# Altium PCB HatpicPCB.pcbdoc
Units mil, origin at the board's own origin, x right, y up, seen from the top; angles counter-clockwise.
Board outline 3892.06 x 4870.86 mil, 2 copper layers (Top Layer, Bottom Layer); 102 components, 80 nets, 328 pads, 102 vias.
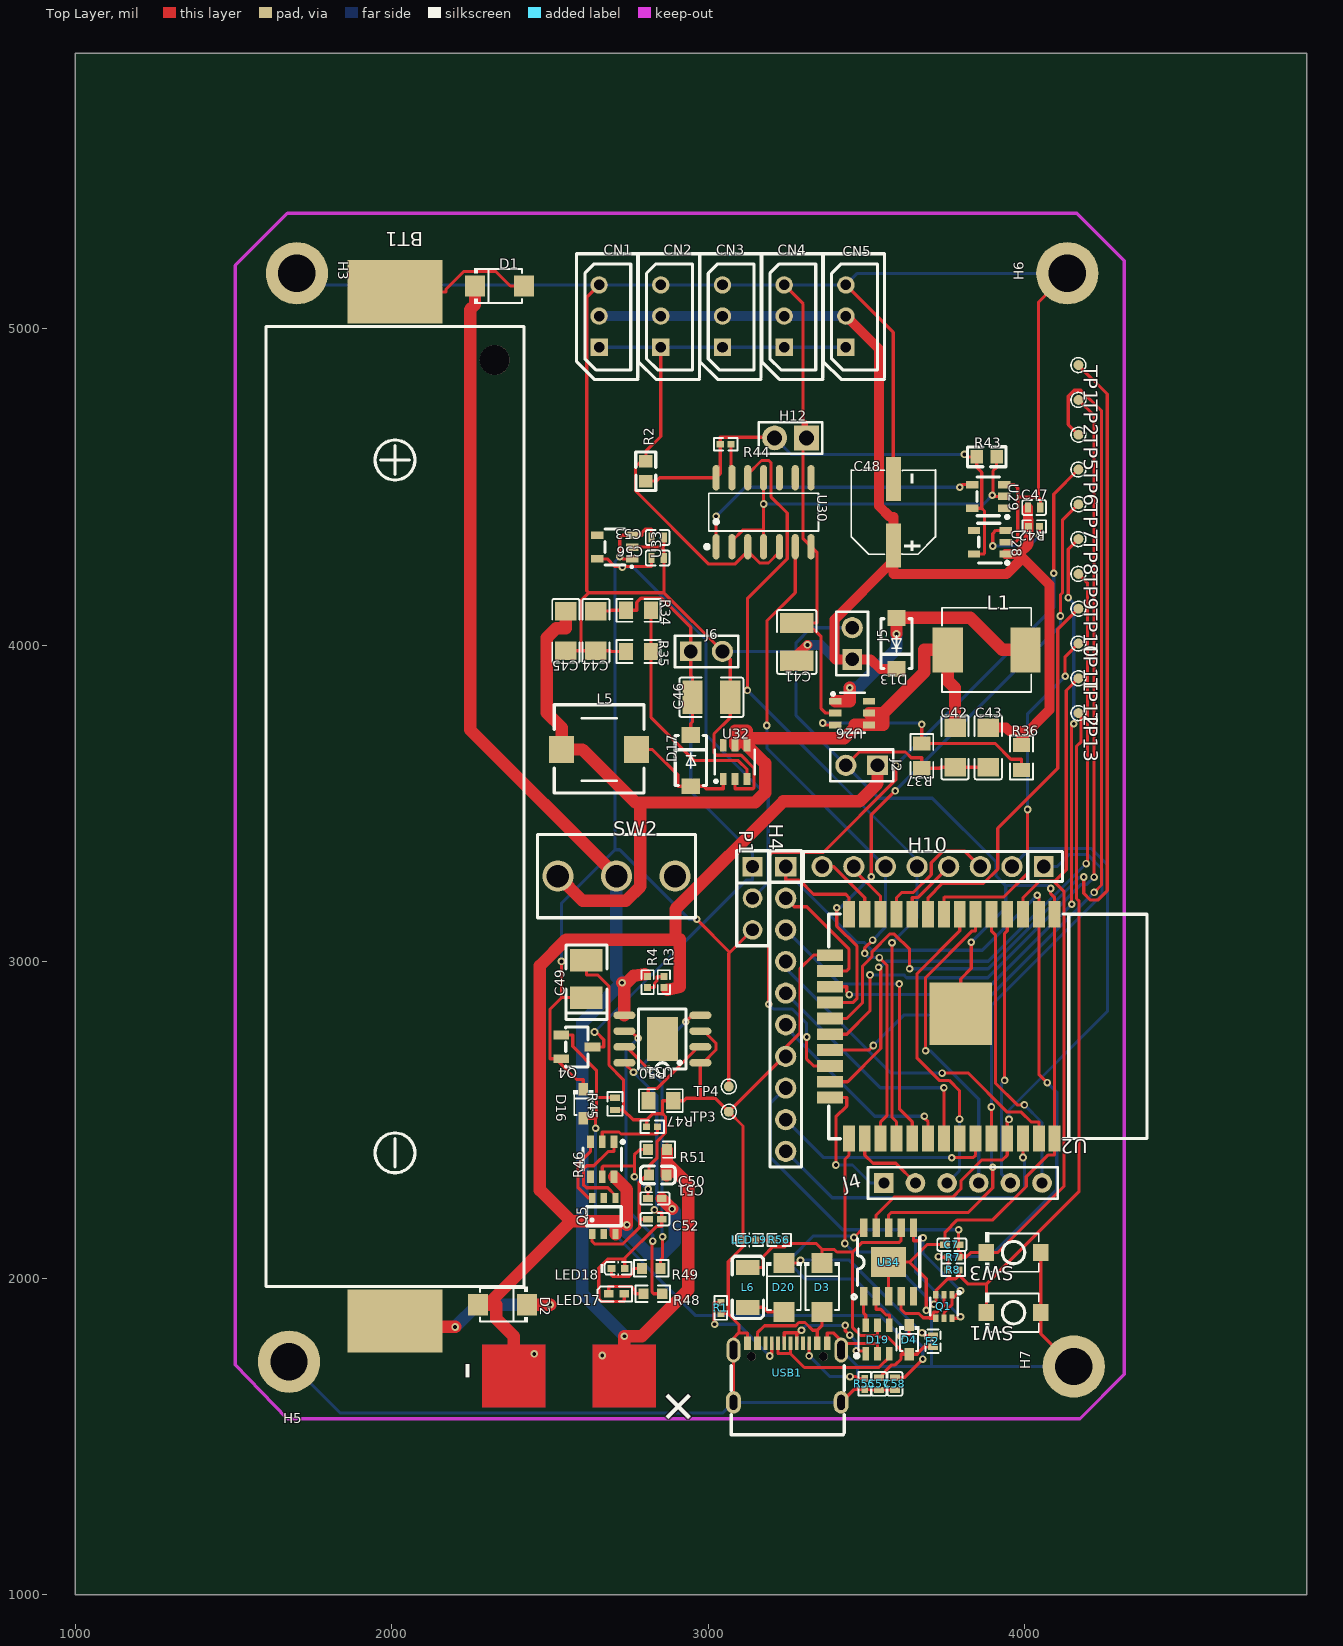
[diagram p0: Top Layer view]
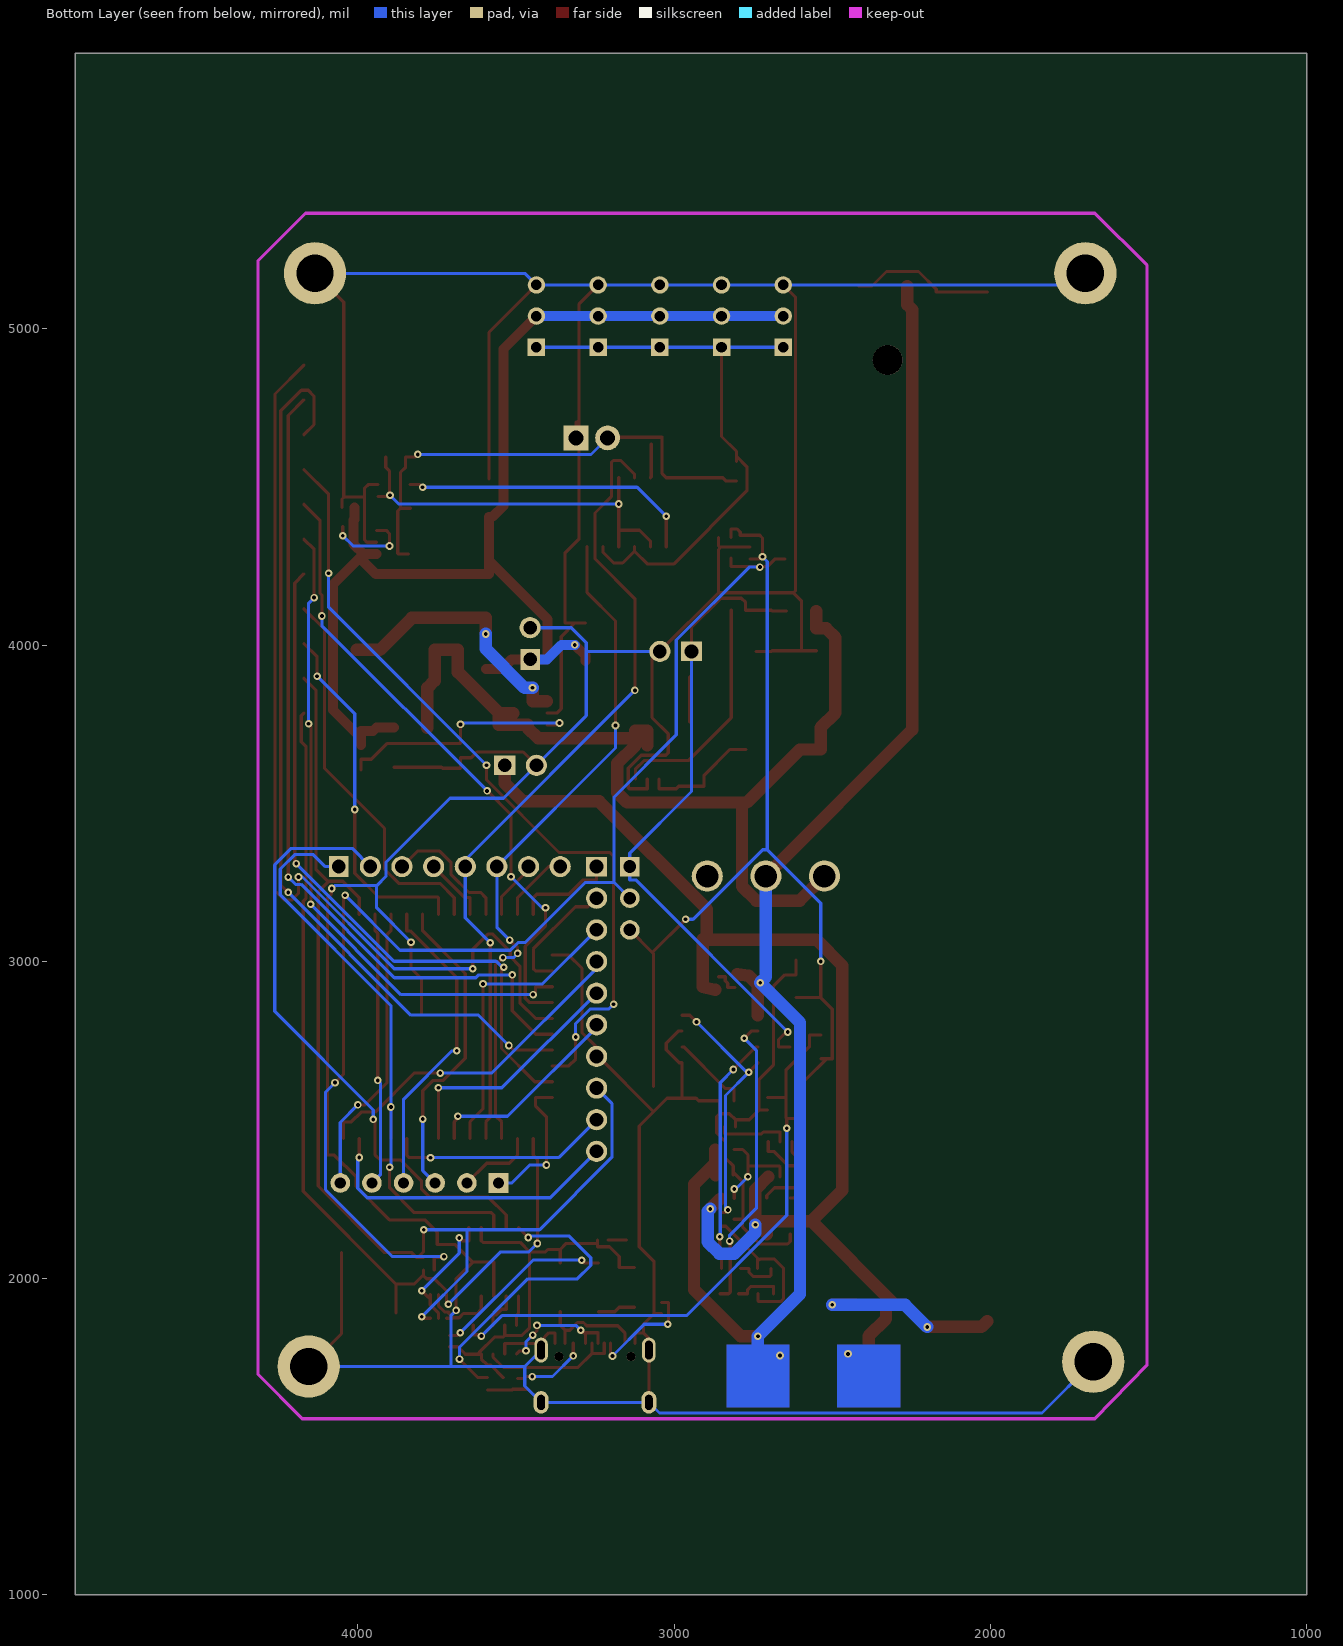
[diagram p1: Bottom Layer view, seen from below]

## Layer stack, top to bottom
Top Layer: signal copper (thickness not stored)
Dielectric: dielectric 12.6, FR-4, Dk 4.8
Bottom Layer: signal copper (thickness not stored)

## Board outline
4892.06,1000 1000,1000 1000,5870.86 4892.06,5870.86

## Components (designator, comment, footprint, x,y, rotation, side; value= is the part's Value field where it differs from the comment)
BT1 "BH-18650-B1BA002" BATTERY-SMD_18650-1S-L77.1-W20.7-1 2010,3490.86 r0 top
C7 "100nF" C0402#1 3770,2105.86 r0 top
C41 "2.2uF" C1210 3280,4010.86 r270 top
C42 "22uF" C1206 3780,3677.46 r90 top
C43 "22uF" C1206 3885,3677.46 r90 top
C44 "22uF" C1206 2645,4045.86 r90 top
C45 "22uF" C1206 2550,4045.86 r90 top
C46 "2.2uF" C1210 3010,3835.86 r180 top
C47 "100n" C0402#2 4030,4435.86 r0 top
C48 "100uF" CAP-SMD_BD6.3-L6.6-W6.6-FD 3585,4420.86 r90 top
C49 "100u, 6.3V" CASE-B_3528 2615,2945.86 r270 top
C50 "10uF" C0603 2840.8,2325.89 r0 top
C51 "100nF" C0402_NEW 2831.48,2251.82 r180 top
C52 "100nF" C0402_NEW 2831.48,2186.09 r0 top
C53 "10u" C0402#2 2840,4340.86 r180 top
C56 "4.7u" C0402#2 2840,4275.86 r180 top
C57 "1u" C0402#2 3540,1665.87 r90 top
C58 "100n" C0402#2 3590,1665.87 r90 top
CN1 "HC-5264-3A" CONN-TH_3P-P2.50_HCTL_HC-5264-3A 2655,5040.86 r90 top
CN2 "HC-5264-3A" CONN-TH_3P-P2.50_HCTL_HC-5264-3A 2850,5040.86 r90 top
CN3 "HC-5264-3A" CONN-TH_3P-P2.50_HCTL_HC-5264-3A 3045,5040.86 r90 top
CN4 "HC-5264-3A" CONN-TH_3P-P2.50_HCTL_HC-5264-3A 3240,5040.86 r90 top
CN5 "HC-5264-3A" CONN-TH_3P-P2.50_HCTL_HC-5264-3A 3435,5040.86 r90 top
D1 "SS14F-PJ" SMAF_L3.5-W2.6-LS4.7-RD 2340,5135.86 r0 top
D2 "SS14F-PJ" SMAF_L3.5-W2.6-LS4.7-RD 2350,1915.87 r180 top
D3 "SS14F-PJ" SMAF_L3.5-W2.6-LS4.7-RD 3360,1970.87 r270 top
D4 "BAT60B" SOD-323_L1.8-W1.3-LS2.5-RD 3635,1805.87 r270 top
D13 "SS34" SMA(DO-214AC) 3595,4005.86 r270 top
D16 "BAT60B" SOD-323_L1.8-W1.3-LS2.5-RD 2605,2550.86 r270 top
D17 "SS34" SMA(DO-214AC) 2945,3635.86 r90 top
D19 "USBLC6-2SC6_C2827654" SOT-23-6_L2.9-W1.6-P0.95-LS2.8-BL 3535,1805.87 r0 top
D20 "SS14F-PJ" SMAF_L3.5-W2.6-LS4.7-RD 3239.15,1970.87 r270 top
F2 "BSMD0402L-035" F0402 3710,1800.87 r270 top
H3 "+" HOLEHOLE 1700,5175.86 r0 top
H4 "Female Header 1x10P 2.54mm" "FEMALE HEADER 1X10P 2.54MM" 3245,2850.86 r270 top
H5 "+" HOLEHOLE 1675,1735.87 r0 top
H6 "+" HOLEHOLE 4135,5175.86 r0 top
H7 "+" HOLEHOLE 4155,1720.87 r0 top
H10 "X6511FV-08-C85D32" HDR-TH_8P-P2.54-V-F 3710,3300.86 r180 top
H12 "PZ254V-11-02P" HDR-TH_2P-P2.54-V-M 3260,4655.86 r180 top
J2 "OUTPUT" HDR-M-2.54_1X2 3485,3620.86 r180 top
J4 "2.54F_1x6" HDR-F-2.54_1X6 3755,2300.86 r0 top
J5 "OUTPUT" HDR-M-2.54_1X2 3455,4005.86 r90 top
J6 "OUTPUT" HDR-M-2.54_1X2 2995,3980.86 r0 top
L1 "22uH" IND-SMD_L7.0-W6.6_FXL0630 3880,3985.86 r0 top
L5 "22uH" 7*7*4 2655,3670.86 r0 top
L6 "600Ω" L1206 3125,1970.87 r270 top
LED17 "SZYY0402G" LED0402-R-RD_GREEN 2710,1950.87 r0 top
LED18 "SZYY0402B" LED0402-RD_BLUE 2715,2030.87 r0 top
LED19 "LTST-C281KRKT" LED0402-RD_RED 3130,2120.86 r0 top
P1 "Header-Female-2.54_1x3" HDR-TH_3P-P2.54-V-F 3140,3200.86 r270 top
Q1 "UMH3N" SC-70-6_L2.2-W1.3-P0.65-LS2.1-BR 3745,1910.87 r90 top
Q4 "CJ2301" SOT-23-3_L3.0-W1.7-P0.95-LS2.9-BR 2585,2730.86 r180 top
Q5 "FS8205" SOT-23-6#1 2670,2195.86 r0 top
R1 "5.1K" R0402#1 3040,1905.87 r90 top
R2 "1k" R0603#1 2802.81,4550.65 r90 top
R3 "1kΩ" R0402#1 2860,2935.86 r90 top
R4 "1kΩ" R0402#1 2808.33,2935.86 r90 top
R7 "100kΩ" R0402#1 3775,2065.86 r0 top
R8 "100kΩ" R0402#1 3775,2025.87 r0 top
R34 "16.2kΩ" R0805 2780,4110.86 r180 top
R35 "2.2kΩ" R0805 2780,3980.86 r0 top
R36 "23.7kΩ" R0805 3990,3645.86 r90 top
R37 "2.2kΩ" R0805 3675,3650.86 r90 top
R42 "10kΩ" R0402#1 4030,4375.86 r180 top
R43 "1k" R0603#1 3880,4595.86 r0 top
R44 "10kΩ" R0402#1 3055,4635.86 r0 top
R45 "100k" R0402#2 2705,2550.86 r270 top
R46 "FM2113_C2832124" SOT-23-6_L2.9-W1.6-P0.95-LS2.8-BR 2665,2375.86 r90 top
R47 "1K" R0402#1 2822.64,2478.65 r0 top
R48 "1.5kΩ" R0603#2 2825,1950.87 r0 top
R49 "1.5kΩ" R0603#2 2820,2030.87 r0 top
R50 "1.2kΩ" R0805 2850,2560.86 r180 top
R51 "100" R0603#2 2840,2406.54 r0 top
R55 "5.1K" R0402#1 3495,1665.87 r90 top
R56 "1kΩ" R0402#1 3225,2120.86 r180 top
SW1 "TS-1088-AR02016" SW-SMD_L3.9-W3.0-P4.45 3965,1890.87 r180 top
SW2 "SS-12D10L5" SW-TH_SS-12D10L5 2710,3270.86 r0 top
SW3 "TS-1088-AR02016" SW-SMD_L3.9-W3.0-P4.45 3965,2080.86 r180 top
TP1 "CMD" TESTPOINT_0.8MM 4170,4885.86 r270 top
TP2 "CLK" TESTPOINT_0.8MM 4170,4775.86 r270 top
TP3 "GND" TESTPOINT_0.8MM 3065,2525.86 r0 top
TP4 "VIN" TESTPOINT_0.8MM 3065,2605.86 r0 top
TP5 "GND" TESTPOINT_0.8MM 4170,4665.86 r270 top
TP6 "GND" TESTPOINT_0.8MM 4170,4555.86 r270 top
TP7 "SD3" TESTPOINT_0.8MM 4170,4445.86 r270 top
TP8 "SD2" TESTPOINT_0.8MM 4170,4335.86 r270 top
TP9 "GPIO15" TESTPOINT_0.8MM 4170,4225.86 r270 top
TP10 "GPIO33" TESTPOINT_0.8MM 4170,4115.86 r270 top
TP11 "GPIO32" TESTPOINT_0.8MM 4170,4005.86 r270 top
TP12 "GPIO15" TESTPOINT_0.8MM 4170,3895.86 r270 top
TP13 "GPIO15" TESTPOINT_0.8MM 4170,3785.86 r270 top
U2 "ESP32-WROOM-32D" WIFIM-SMD_39P-L25.5-W18.0-P1.27-BL 3740,2795.86 r180 top
U26 "MT3608" SOT-23-6#2 3455,3785.86 r0 top
U28 "SPX5205M5-L-5-0/TR" SOT-23-5_L3.0-W1.7-P0.95-LS2.8-TL 3890,4325.86 r180 top
U29 "SN74AHC1G04DBVR" SOT-23-5_L3.0-W1.7-P0.95-LS2.8-BR 3885,4470.86 r0 top
U30 "74HC126D,653" SOIC-14_L8.7-W3.9-P1.27-LS6.0-BL 3175,4420.86 r0 top
U31 "TP4056" SOP-8_EP_150MIL 2855,2755.86 r180 top
U32 "MT3608" SOT-23-6#2 3085,3630.86 r90 top
U33 "XC6220B331MR-G" TSOT-23-5_L2.9-W1.6-P0.95-LS2.8-BL 2705,4310.86 r90 top
U34 "CH340K" ESOP-10_L4.9-W3.9-P1.00-LS6.2-BL-EP 3570,2050.86 r0 top
USB1 "TYPE-C 16PIN 2MD(073)" USB-C-SMD_TYPE-C-6PIN-2MD-073 3250,1700.87 r0 top

## Footprints (in the part's own frame and the unit in brackets; to place one, negate y for a bottom-side part, rotate by r counter-clockwise, add the part's x,y. Pads: shape width x height; smd on the part's side, far side on the other; paste and mask are expansions set on the pad)
7*7*4 [mil]
  rect 79x86.61 smd paste+0 mask+2: 1(-118,0) 2(118,0)
  silkscreen extent -142,-138 142,142
BATTERY-SMD_18650-1S-L77.1-W20.7-1 [mm]
  rect 7.62x5.08 smd paste+0 mask+0.051: 1(0,-41.313) 2(0,41.313)
  round 2.4 hole 2.4 unplated paste+0: ""(8,35.84)
  silkscreen extent -10.35,-38.54 10.35,38.54
C0402#1 [mm]
  rect 0.79x0.54 smd paste-100 mask+0.051: 1(-0.545,0) 2(0.545,0)
  silkscreen extent -1.17,-0.5 1.17,0.5
C0402#2 [mm]
  rect 0.5x0.8 smd paste+0 mask+0.102: 1(-0.5,0) 2(0.5,0)
  silkscreen extent -0.95,-0.6 0.95,0.6
C0402_NEW [mm]
  rect 0.79x0.54 smd paste-100 mask+0.051: 1(-0.545,0) 2(0.545,0)
  silkscreen extent -1.17,-0.5 1.17,0.5
C0603 [mm]
  rect 0.8x0.9 smd paste+0 mask+0.051: 1(-0.7,0) 2(0.7,0)
  silkscreen extent -1.41,-0.71 1.39,0.72
C1206 [mm]
  rect 1.485x1.728 smd paste-100 mask+0.051: 1(-1.593,0) 2(1.593,0)
  silkscreen extent -2.56,-1.09 2.56,1.09
C1210 [mm]
  rect 1.635x2.7 smd paste-100 mask+0.051: 1(-1.517,0) 2(1.517,0)
  silkscreen extent -2.56,-1.58 2.56,1.58
CAP-SMD_BD6.3-L6.6-W6.6-FD [mm]
  rect 3.5x1.2 smd paste+0 mask+0.051: 1(-2.67,0) 2(2.67,0)
  silkscreen extent -3.38,-3.38 3.38,3.38
CASE-B_3528 [mm]
  rect 1.8x2.6 smd paste+0 mask+0.051: 1(1.501,0) 2(-1.501,0)
  silkscreen extent -2.73,-1.65 3.26,1.65
CONN-TH_3P-P2.50_HCTL_HC-5264-3A [mm]
  rect 1.4x1.4 hole 0.85 paste+0 mask+0.05: 1(-2.5,0)
  round 1.4 hole 0.85 paste+0 mask+0.05: 2(0,0) 3(2.5,0)
  silkscreen extent -5.08,-3.1 5,1.8
ESOP-10_L4.9-W3.9-P1.00-LS6.2-BL-EP [mm]
  rect 0.6x1.5 smd paste+0 mask+0.051: 1(-2,-2.75) 2(-1,-2.75) 3(0,-2.75) 4(1,-2.75) 5(2,-2.75) 6(2,2.75) 7(1,2.75) 8(0,2.75) 9(-1,2.75) 10(-2,2.75)
  rect 2.8x2.4 smd paste+0 mask+0.051: 11(0,0)
  silkscreen extent -2.94,-2.96 2.5,2
F0402 [mm]
  rect 0.5x0.8 smd paste+0 mask+0.051: 1(-0.45,0) 2(0.45,0)
  silkscreen extent -0.95,-0.6 0.95,0.6
"FEMALE HEADER 1X10P 2.54MM" [mm]
  rect 1.575x1.7 hole 1.1 paste+0 mask+0.051: 1(-11.43,0)
  round 1.7 hole 1.1 paste+0 mask+0.051: 2(-8.89,0) 3(-6.35,0) 4(-3.81,0) 5(-1.27,0) 6(1.27,0) 7(3.81,0) 8(6.35,0) 9(8.89,0) 10(11.43,0)
  silkscreen extent -12.7,-1.27 12.7,1.27
HDR-F-2.54_1X6 [mil]
  rect 62x62 hole 35 paste+0 mask+2: 1(-200,0)
  round 62 hole 35 paste+0 mask+2: 2(-100,0) 3(0,0) 4(100,0) 5(200,0) 6(300,0)
  silkscreen extent -250,-50 350,50
HDR-M-2.54_1X2 [mm]
  rect 1.7x1.575 hole 1.1 paste+0 mask+0.051: 1(-1.27,0)
  round 1.7 hole 1.1 paste+0 mask+0.051: 2(1.27,0)
  silkscreen extent -2.54,-1.27 2.54,1.27
HDR-TH_2P-P2.54-V-M [mm]
  rect 2x2 hole 1.2 paste+0 mask+0.051: 1(-1.27,0)
  round 2 hole 1.2 paste+0 mask+0.051: 2(1.27,0)
  silkscreen extent -2.54,-1.27 2.54,1.27
HDR-TH_3P-P2.54-V-F [mil]
  rect 62x62 hole 40.16 paste+0 mask+2: 1(-100,0)
  round 62 hole 40.16 paste+0 mask+2: 2(0,0) 3(100,0)
  silkscreen extent -150,-50 150,50
HDR-TH_8P-P2.54-V-F [mm]
  rect 1.575x1.7 hole 1.1 paste+0 mask+0.051: 1(-8.89,0)
  round 1.7 hole 1.1 paste+0 mask+0.051: 2(-6.35,0) 3(-3.81,0) 4(-1.27,0) 5(1.27,0) 6(3.81,0) 7(6.35,0) 8(8.89,0)
  silkscreen extent -10.4,-1.2 10.4,1.2
HOLEHOLE [mm]
  round 5 hole 3 paste+0 mask+0.102: 1(0,0)
IND-SMD_L7.0-W6.6_FXL0630 [mm]
  rect 2.424x3.62 smd paste+0 mask+0.051: 1(3.128,0) 2(-3.128,0)
  silkscreen extent -3.58,-3.38 3.58,3.38
L1206 [mm]
  rect 1.2x1.9 smd paste+0 mask+0.102: 1(-1.6,0) 2(1.6,0)
  silkscreen extent -2.5,-1.25 2.5,1.25
LED0402-R-RD_GREEN [mm]
  rect 0.75x0.6 smd paste+0 mask+0.051: 1(0.623,0) 2(-0.623,0)
  silkscreen extent -1.51,-0.61 1.26,0.58
LED0402-RD_BLUE [mm]
  rect 0.636x0.54 smd paste-100 mask+0.051: 1(-0.538,0) 2(0.538,0)
  silkscreen extent -1.39,-0.54 1.09,0.54
LED0402-RD_RED [mm]
  rect 0.636x0.54 smd paste-100 mask+0.051: 1(-0.508,0) 2(0.508,0)
  silkscreen extent -1.39,-0.54 1.09,0.54
R0402#1 [mm]
  rect 0.566x0.54 smd paste-100 mask+0.051: 1(-0.433,0) 2(0.433,0)
  silkscreen extent -0.94,-0.5 0.94,0.5
R0402#2 [mm]
  rect 0.5x0.8 smd paste+0 mask+0.102: 1(-0.5,0) 2(0.5,0)
  silkscreen extent -0.95,-0.6 0.95,0.6
R0603#1 [mm]
  rect 1x1.1 smd paste+0 mask+0.051: 1(-0.8,0) 2(0.8,0)
  silkscreen extent -1.55,-0.8 1.55,0.81
R0603#2 [mm]
  rect 0.806x0.864 smd paste-100 mask+0.051: 1(-0.753,0) 2(0.753,0)
  silkscreen extent -1.39,-0.66 1.39,0.66
R0805 [mil]
  rect 44.59x54.21 smd paste-3937.01 mask+2: 1(-39.37,0) 2(39.37,0)
  silkscreen extent -69,-36 69,36
SC-70-6_L2.2-W1.3-P0.65-LS2.1-BR [mm]
  rect 0.6x0.42 smd paste+0 mask+0.051: 1(0.95,-0.65) 2(0.95,0) 3(0.95,0.65) 4(-0.95,0.65) 5(-0.95,0) 6(-0.95,-0.65)
  silkscreen extent -0.7,-1.34 1.22,1.1
SMA(DO-214AC) [mil]
  rect 50x57.9 smd paste+0 mask+2: 1(-81,0) 2(81,0)
  silkscreen extent -78,-49 79,49
SMAF_L3.5-W2.6-LS4.7-RD [mm]
  rect 1.6x1.7 smd paste+0 mask+0.051: 1(-1.96,0) 2(1.96,0)
  silkscreen extent -2.01,-1.43 1.83,1.42
SOD-323_L1.8-W1.3-LS2.5-RD [mm]
  rect 1x0.75 smd paste+0 mask+0.051: 1(-1.173,0) 2(1.173,0)
  silkscreen extent -1.08,-0.8 0.9,0.8
SOIC-14_L8.7-W3.9-P1.27-LS6.0-BL [mil]
  oval 22.6x80.24 smd paste+0 mask+2: 1(-150,-109.02) 2(-100,-109.02) 3(-50,-109.02) 4(0,-109.02) 5(50,-109.02) 6(100,-109.02) 7(150,-109.02) 8(150,109.02) 9(100,109.02) 10(50,109.02) 11(0,109.02) 12(-50,109.02) 13(-100,109.02) 14(-150,109.02)
  silkscreen extent -185,-115 173,60
SOP-8_EP_150MIL [mil]
  oval 70x24 smd paste+0 mask+2: 1(-120,75) 2(-120,25) 3(-120,-25) 4(-120,-75) 5(120,-75) 6(120,-25) 7(120,25) 8(120,75)
  rect 98.42x137.79 smd paste+0 mask+4: 9(0,0)
  silkscreen extent -75,-95 75,95
SOT-23-3_L3.0-W1.7-P0.95-LS2.9-BR [mm]
  rect 1.25x0.7 smd paste+0 mask+0.102: 1(1.25,-0.95) 2(1.25,0.95) 3(-1.25,0)
  silkscreen extent -0.9,-1.6 0.9,1.6
SOT-23-5_L3.0-W1.7-P0.95-LS2.8-BR [mm]
  rect 1x0.6 smd paste+0 mask+0.051: 1(1.3,-0.95) 2(1.3,0) 3(1.3,0.95) 4(-1.3,0.95) 5(-1.3,-0.95)
  silkscreen extent -0.9,-1.78 1.65,1.55
SOT-23-5_L3.0-W1.7-P0.95-LS2.8-TL [mm]
  rect 1x0.55 smd paste+0 mask+0.051: 1(-1.271,0.95) 2(-1.271,0) 3(-1.271,-0.95) 4(1.271,-0.95) 5(1.271,0.95)
  silkscreen extent -1.52,-1.52 0.97,1.78
SOT-23-6#1 [mil]
  rect 20.1x31.5 smd paste+0 mask+2: 1(-37,-57) 2(0,-57) 3(37,-57) 4(37,57) 5(0,57) 6(-37,57)
  silkscreen extent -55,-30 55,30
SOT-23-6#2 [mil]
  rect 39.37x21.65 smd paste+0 mask+4: 1(-53.16,37.4) 2(-53.16,0) 3(-53.16,-37.4) 4(53.14,-37.4) 5(53.14,0) 6(53.14,37.4)
  silkscreen extent -66,-62 40,66
SOT-23-6_L2.9-W1.6-P0.95-LS2.8-BL [mm]
  rect 0.532x1.072 smd paste+0 mask+0.051: 1(-0.95,-1.149) 2(0,-1.149) 3(0.95,-1.149) 4(0.95,1.149) 5(0,1.149) 6(-0.95,1.149)
  silkscreen extent -1.82,-1.45 1.54,0.89
SOT-23-6_L2.9-W1.6-P0.95-LS2.8-BR [mm]
  rect 1x0.55 smd paste+0 mask+0.051: 1(1.4,-0.95) 2(1.4,0) 3(1.4,0.95) 4(-1.4,0.95) 5(-1.4,0) 6(-1.4,-0.95)
  silkscreen extent -0.9,-1.78 1.52,1.55
SW-SMD_L3.9-W3.0-P4.45 [mm]
  rect 1.23x1.36 smd paste+0 mask+0.051: 1(-2.185,0) 2(2.185,0)
  silkscreen extent -2.03,-1.62 2.25,1.62
SW-TH_SS-12D10L5 [mm]
  round 2.5 hole 1.8 paste+0 mask+0.051: 1(-4.7,0) 2(0,0) 3(4.7,0)
  silkscreen extent -6.35,-3.35 6.35,3.35
TESTPOINT_0.8MM [mm]
  round 0.8 smd paste+0 mask+0.102: 1(0,0)
  silkscreen extent -0.6,-0.6 0.6,0.6
TSOT-23-5_L2.9-W1.6-P0.95-LS2.8-BL [mm]
  rect 0.6x1 smd paste+0 mask+0.102: 1(-0.95,-1.4) 2(0,-1.4) 3(0.95,-1.4) 4(0.95,1.4) 5(-0.95,1.4)
  silkscreen extent -1.65,-1.41 1.45,0.8
USB-C-SMD_TYPE-C-6PIN-2MD-073 [mm]
  rect 0.55x1.1 smd paste-100 mask+0.05: 1(-3.2,2.375) 2(-2.4,2.375) 11(2.4,2.375) 12(3.2,2.375)
  rect 0.3x1.1 smd paste-100 mask+0.05: 3(-1.75,2.375) 4(-1.25,2.375) 5(-0.75,2.375) 6(-0.25,2.375) 7(0.25,2.375) 8(0.75,2.375) 9(1.25,2.375) 10(1.75,2.375)
  oval 1.2x1.8 hole 0.6 slot 1.2 at 90 deg paste+0 mask+0.05: 13(-4.325,-2.375) 14(4.325,-2.375)
  oval 1.1x2 hole 0.6 slot 1.5 at 90 deg paste+0 mask+0.05: 13(-4.325,1.825) 14(4.325,1.825)
  round 0.7 hole 0.7 unplated paste+0: ""(-2.89,1.305) ""(2.89,1.305)
  silkscreen extent -4.5,-4.97 4.57,0.6
WIFIM-SMD_39P-L25.5-W18.0-P1.27-BL [mm]
  rect 0.95x2.1 smd paste+0 mask+0.051: 1(-9.015,-9) 2(-7.745,-9) 3(-6.475,-9) 4(-5.205,-9) 5(-3.935,-9) 6(-2.665,-9) 7(-1.395,-9) 8(-0.125,-9) 9(1.145,-9) 10(2.415,-9) 11(3.685,-9) 12(4.955,-9) 13(6.225,-9) 14(7.495,-9) 25(7.495,9) 26(6.225,9) 27(4.955,9) 28(3.685,9) 29(2.415,9) 30(1.145,9) 31(-0.125,9) 32(-1.395,9) 33(-2.665,9) 34(-3.935,9) 35(-5.205,9) 36(-6.475,9) 37(-7.745,9) 38(-9.015,9)
  rect 2.1x0.95 smd paste+0 mask+0.051: 15(9.015,-5.715) 16(9.015,-4.445) 17(9.015,-3.175) 18(9.015,-1.905) 19(9.015,-0.635) 20(9.015,0.635) 21(9.015,1.905) 22(9.015,3.175) 23(9.015,4.445) 24(9.015,5.715)
  rect 5x5 smd paste+0 mask+0.051: 39(-1.472,-1.017)
  silkscreen extent -16.44,-9.02 9.12,9.02

## Via types
v1: diameter 24.02, hole 12.01, Top Layer to Bottom Layer, tented both sides, 98 vias
v2: diameter 24.41, hole 12.2, Top Layer to Bottom Layer, tented both sides, 4 vias

## Nets (pads, with @x,y where several pads share a name; then routed paths per layer and width w, separated by ;. In a path a pad name is that pad's centre, name@x,y a point inside that pad or via, vN(x,y) a via of type N, cw(c..) or ccw(c..) an arc to the next point about the centre after c; other vN are vias at no path point)
5V_TTL: H12.2 R2.1 R43.1 R44.1 U28.5 U29.5 U30.14 | length 1576.4
  Top Layer w10: R2.1 2835.61,4519.15 2846.34,4529.89 U30.14 3037.96,4542.85 R44.1 3037.96,4657.65 3038.02,4657.7 3208.16,4657.7 H12.2 ; v1(3810.08,4603.45) 3817.67,4595.86 R43.1 3848.51,4579.47 3848.51,4563.06 3864.71,4546.86 3864.71,4433.52 3864.65,4433.47 ; U29.5 3864.65,4433.47 ; U28.5@3839.95,4288.47 3870.78,4288.47 3873.33,4291.02 3873.33,4424.78 3864.65,4433.47
  Bottom Layer w10: H12.2 3262.41,4603.45 v1(3810.08,4603.45)
+3V3: C56.2 P1.2 R7.1 R8.1 U2.2 U33.5 | length 3986.7
  Top Layer w10: U33.5 2680.72,4273.47 2705.21,4248.98 v1@2728.71,4248.98 ; v1(2728.71,4247.35) v1@2728.71,4248.98 ; C56.2 2820.31,4248.98 v1@2728.71,4248.98 ; v1(3727.37,2068.2) 3733.35,2068.2 3735.68,2065.86 R7.1 R8.1 ; v1(4039.82,3209.99) 4039.82,3207.78 4044.93,3202.68 4044.93,3176.43 U2.2 4044.93,2644.74 v1(4071.67,2618.01)
  Bottom Layer w10: v1(2728.71,4247.35) 2762.48,4247.35 2992.95,4016.89 2992.95,3717.3 3189.56,3520.68 3189.56,3250.43 ; P1.2 3189.56,3250.43 ; v1(3727.37,2068.2) 3889.94,2068.2 4101.71,2279.97 4101.71,2587.97 v1(4071.67,2618.01) ; v1(4039.82,3209.99) 3866.39,3036.55 3517.23,3036.55 3493.04,3060.74 3470.56,3060.74 3280.88,3250.43 3189.56,3250.43
+5V: C44.2 C46.2 D17.2 J6.1 P1.1 Q4.3 R34.2 | length 2313.7
  Top Layer w10: Q4.3 2669.96,2730.86 2669.96,2753.76 2645.76,2777.97 v1(2640.54,2777.97) ; C44.2 2690.17,4108.56 2692.47,4110.86 R34.2 2774.07,4110.86 2774.07,4135.94 2787.31,4149.19 2852.58,4149.19 2945,4056.76 J6.1 2945,3905.43 2950.26,3900.16 C46.2 2950.26,3758.28 2945,3753.01 D17.2
  Bottom Layer w10: v1(2640.54,2777.97) 3121.28,3258.72 3140,3258.72 P1.1 3140,3343.01 2945,3538.01 J6.1
BOOT: Q1.3 R8.2 SW1.2 TP13.1 U2.25 | length 2981.5
  Top Layer w10: v1(3432.11,2109.53) 3432.11,2376.22 3444.93,2389.05 U2.25 ; v1(3713.37,1917.85) 3713.37,1919.27 3719.41,1925.31 Q1.3 3719.41,1959.74 3757.58,1997.91 3781.82,1997.91 3792.04,2008.13 3792.04,2011.05 ; R8.2 3792.04,2011.05 ; SW1.2 3878.98,1928.79 3878.98,1981.08 ; TP13.1 4178.48,3777.39 4178.48,3695.62 4163.84,3680.99 4163.84,3199.61 4172.08,3191.36 4172.08,2274.18 3878.98,1981.08 ; 3792.04,2011.05 3822.01,1981.08 3878.98,1981.08
  Bottom Layer w10: v1(3432.11,2109.53) 3458.49,2083.14 3548.07,2083.14 v1(3713.37,1917.85)
BT1_1: BT1.1 D2.1 | length 599.5
  Top Layer w39.37: BT1.1 2028.5,1845.87 v2(2200,1845.87) ; D2.1 v2(2500,1915.87)
  Bottom Layer w39.37: v2(2200,1845.87) 2270,1915.87 v2(2500,1915.87)
BT1_2: BT1.2 D1.2 | length 457.6
  Top Layer w10: BT1.2 2171.15,5117.36 2171.15,5125.43 2227.48,5181.76 2328.63,5181.76 2374.52,5135.86 D1.2
CHRG_BOOL: R49.2 U31.7 | length 756.2
  Top Layer w10: U31.7 2741.12,2730.86 v1(2812.47,2659.51) ; R49.2 2849.66,2059.03 2855.89,2065.26 v1(2855.89,2130.64)
  Bottom Layer w10: v1(2812.47,2659.51) 2853.9,2618.09 2853.9,2132.64 v1(2855.89,2130.64)
CLK: TP2.1 U2.20 | length 2643.2
  Top Layer w10: U2.20 3437.58,2770.86 3511.38,2844.66 v1(3511.38,2958.62) ; TP2.1 4219.48,4726.39 v1(4219.48,3267.47)
  Bottom Layer w10: v1(3511.38,2958.62) 3617.76,2958.62 3626.72,2949.66 3883.95,2949.66 4178.95,3244.66 4196.68,3244.66 v1(4219.48,3267.47)
CMD: TP1.1 U2.19 | length 3036.4
  Top Layer w10: U2.19 3437.63,2820.86 3487.49,2870.72 3487.49,2986.39 3517.82,3016.72 3517.82,3032.24 3572.96,3087.38 3588.35,3087.38 3636.33,3039.39 v1(3636.33,2978.09) ; TP1.1 4261.3,4794.56 4261.3,3224.93 4231.35,3194.99 4208.1,3194.99 4187.06,3216.03 v1(4187.06,3267.89)
  Bottom Layer w10: v1(3636.33,2978.09) 3884.72,2978.09 4174.51,3267.89 v1(4187.06,3267.89)
D13_1: D13.1 L1.1 U26.1 | length 834.8
  Top Layer w39.37: U26.1 3447.39,3823.26 v1(3447.39,3865.95) ; v1(3595,4036.03) D13.1 3828.59,4086.86 3929.59,3985.86 L1.1
  Bottom Layer w39.37: v1(3447.39,3865.95) 3472.18,3865.95 3595,3988.76 v1(3595,4036.03)
D_N: D19.3 USB1.5 USB1.7 | length 459.6
  Top Layer w10: USB1.5 3220.48,1761.57 3220.54,1761.51 3259.7,1761.51 3259.85,1761.65 ; USB1.7 3259.85,1765.62 3259.85,1761.65 ; D19.3 3572.4,1750.61 3539.27,1717.47 3303.94,1717.47 3259.85,1761.57 3259.85,1761.65
D_P: D19.1 USB1.6 USB1.8 | length 398.8
  Top Layer w10: USB1.6 3240.16,1827.17 3240.22,1827.23 3277.8,1827.23 ; USB1.8 3279.53,1827.17 3277.86,1827.17 3277.8,1827.23 ; v1(3294.9,1835.35) 3286.79,1827.23 3277.8,1827.23 ; v1(3433.26,1850.81) 3433.26,1833.92 v1(3446.99,1820.19) ; v1(3467.93,1770.28) 3487.95,1770.28 D19.1
  Bottom Layer w10: v1(3294.9,1835.35) 3310.36,1850.81 v1(3433.26,1850.81) ; v1(3446.99,1820.19) 3467.93,1799.26 v1(3467.93,1770.28)
DATA_TTL: CN1.1 CN2.1 CN3.1 CN4.1 CN5.1 R2.2 U30.3 U30.5 | length 1911.3
  Top Layer w10: R2.2@2802.81,4582.15 R2.2@2802.81,4597.57 ; CN2.1 2850,4660.18 2802.81,4612.98 R2.2@2802.81,4597.57 ; U30.3 U30.3@3125,4298.06 ; U30.5 3225,4295.06 3190.46,4260.52 3162.53,4260.52 U30.3@3125,4298.06 ; R2.2@2802.81,4597.57 2769.95,4564.72 2769.95,4488.15 3001.38,4256.73 3083.67,4256.73 U30.3@3125,4298.06
  Bottom Layer w10: CN1.1 CN2.1 CN3.1 CN4.1 CN5.1
DTR: Q1.2 Q1.4 U34.4 | length 262.2
  Top Layer w10: U34.4 3609.37,1901.92 3622.97,1888.33 3665.91,1888.33 3679.42,1874.82 3698.65,1874.82 ; Q1.4 3699.99,1873.46 3698.65,1874.81 ; Q1.2 3745,1925.31 3745,1913.23 3724.68,1892.91 3712.61,1892.91 3712.25,1892.56 3712.25,1888.41 3698.65,1874.82
GND: C7.1 C41.1 C42.1 C43.1 C44.1 C45.1 C46.1 C47.2 C48.2 C49.2 C50.1 C52.1 C53.1 C56.1 C57.1 C58.1 CN1.3 CN2.3 CN3.3 CN4.3 CN5.3 D19.2 H3.1 H4.7 H5.1 H6.1 H7.1 H12.1 J2.2 J5.2 J6.2 LED19.1 Q5.1 R1.1 R35.1 R37.1 R45.2 R47.1 R50.1 R55.1 SW1.1 SW3.1 TP3.1 U2.1 U2.15 U2.38 U2.39 U26.2 U28.2 U29.3 U30.7 U31.1 U31.3 U32.2 U33.2 U34.3 U34.11 USB1.1 USB1.12 USB1.13 USB1.14 | length 20535.5
  Top Layer w10: C45.1 2597.5,3983.16 ; C49.2 2615,2958.39 2649.93,2958.39 2686.2,2922.11 2686.2,2673.2 2731.96,2627.43 2731.96,2531.24 2731.9,2531.18 ; Q5.1 2633,2116.01 2641.05,2107.97 2729.81,2107.97 2783.32,2161.47 2783.32,2186.09 2786.38,2186.09 ; CN1.3 2616.23,5100.52 2616.23,4172.8 2622.84,4166.19 ; R45.2 2731.9,2531.18 ; R35.1 2692.47,3980.86 2690.17,3983.16 C44.1 2597.5,3983.16 ; U33.2 2856.57,4310.86 ; R47.1 2805.6,2500.43 ; C52.1 2786.38,2186.09 ; C50.1 C50.1@2813.24,2340.32 ; C53.1 2859.68,4313.98 2856.57,4310.86 ; U31.3 2986.63,2780.86 3024.72,2742.78 3024.72,2721.53 2984.06,2680.86 U31.1 2975,2568.45 ; R1.1 3061.78,1888.83 ; USB1.13@3079.73,1607.36 3079.73,1772.71 3079.73,1809.88 3097.02,1827.17 ; U32.2 3085,3546.86 3085.06,3546.8 3141.88,3546.8 3144.79,3549.72 3144.79,3611.97 3103.81,3652.95 3026.05,3652.95 3018.29,3660.72 3018.29,3720.11 3069.74,3771.57 C46.1 3069.74,3896.11 3069.74,3900.07 3069.74,3900.16 3069.74,3956.12 J6.2 2859.68,4166.19 ; USB1.1 3124.02,1827.17 3097.02,1827.17 ; CN4.3 3300,5079.28 3300,4711.19 ; C41.1 C41.1@3313.68,4070.61 ; H12.1 3310,4706.39 3304.8,4706.39 3300,4711.19 ; USB1.12 3375.99,1827.17 3395.71,1827.17 3420.28,1802.61 USB1.14@3420.28,1793.69 ; U2.15 3332.59,3020.86 3290.85,2979.12 3290.85,2775.62 3245,2729.78 H4.7 3240,2700.86 TP3.1 ; U26.2 3371,3785.86 3356.65,3800.22 3356.65,4027.64 C41.1@3313.69,4070.61 ; USB1.14@3420.28,1607.36 3461.75,1648.83 R55.1 3510.47,1648.83 3513.11,1646.18 C57.1 C58.1 ; USB1.14@3420.28,1772.71 USB1.14@3420.28,1793.69 ; J2.2 3477.21,3663.07 3623.42,3663.07 3641.56,3644.93 3675,3644.93 R37.1 3731.56,3611.49 3734.83,3614.76 C42.1 C43.1 ; CN5.3 3585,4989.28 C48.2 ; D19.2 3535,1792.88 3534.18,1793.69 USB1.14@3420.28,1793.69 ; U34.3 U34.11 3636.26,2050.86 ; v1(3689.03,1898.04) 3689.03,1998.1 3636.26,2050.86 ; U2.39 3797.95,2945.47 3831.39,2978.91 v1(3831.39,3061.84) ; U29.3 3967.02,4508.27 3978.01,4497.27 3978.01,4468.45 ; U28.2 3970.89,4325.86 3978.01,4332.98 3978.01,4468.45 ; C47.2 4049.69,4462.77 4044,4468.45 ; SW3.1 SW1.1 4051.02,1824.85 H7.1 ; v1(4082.28,3231.43) 4082.28,3215.32 4094.93,3202.68 U2.1 4094.93,3097.7 4094.93,2494.03 4094.93,2467.78 U2.38 4094.93,2389.05 4073.68,2389.05 4005,2320.36 4005,2289.59 3899.71,2184.3 3787.55,2184.3 3748.54,2145.28 C7.1 3691.26,2105.86 3636.26,2050.86 ; H6.1 4044,5084.86 4044,4468.45 ; 2597.5,3983.16 2597.5,4140.85 2622.84,4166.19 ; 2622.84,4166.19 2859.68,4166.19 ; 2731.9,2531.18 2762.64,2500.43 2805.6,2500.43 ; 2786.38,2186.09 2781.96,2190.51 2781.96,2303.2 2813.24,2334.47 C50.1@2813.24,2340.32 ; 2805.6,2500.43 2825.05,2519.89 2855.93,2519.89 ; C50.1@2813.24,2340.32 2813.24,2354.76 2837.61,2379.12 2837.61,2431.38 2864.91,2458.68 2864.91,2510.91 2855.93,2519.89 ; 2855.93,2519.89 2855.93,2560.86 R50.1 2922.82,2560.86 2930.41,2568.45 2975,2568.45 ; 2856.57,4310.86 2856.57,4305.88 2859.68,4302.77 C56.1 2859.68,4166.19 ; 2975,2568.45 3022.41,2568.45 TP3.1 ; 3061.78,1888.83 3063.22,1890.27 3063.22,2052.32 3109.99,2099.09 LED19.1 3109.99,2480.88 TP3.1 ; 3061.78,1888.83 3097.02,1853.59 3097.02,1827.17 ; 3300,4711.19 3300,4336.85 U30.7 3344.3,4292.55 3344.3,4070.61 C41.1@3313.69,4070.61 ; 3978.01,4468.45 4044,4468.45
  Bottom Layer w10: H5.1 1837.02,1573.85 3046.22,1573.85 3079.73,1607.36 3420.28,1607.36 3472.13,1659.2 3472.13,1720.87 ; H3.1 1736.57,5139.3 CN1.3 CN2.3 CN3.3 CN4.3 CN5.3 3471.58,5175.86 H6.1 ; J6.2 3277.78,3980.86 ; USB1.14@3420.28,1772.71 3472.13,1720.87 ; J5.2 3324.86,4055.86 3277.78,4008.78 3277.78,3980.86 ; v1(3689.03,1898.04) 3705.43,1881.63 3705.43,1720.87 ; v1(3831.39,3061.84) 3940.1,3170.55 3940.1,3240.84 ; v1(4082.28,3231.43) 4072.86,3240.84 3940.1,3240.84 ; H7.1 3705.43,1720.87 ; 3277.78,3980.86 3277.78,3778.09 J2.2 3538.99,3516.88 3708.32,3516.88 3910,3315.2 3910,3270.95 3940.1,3240.84 ; 3472.13,1720.87 3705.43,1720.87
GPIO2: J4.1 U2.24 | length 454.8
  Top Layer w10: U2.24 3437.58,2570.86 3437.58,2543.93 3403.55,2509.91 v1(3403.55,2357.61)
  Bottom Layer w10: v1(3403.55,2357.61) 3456.1,2357.61 3512.85,2300.86 J4.1
GPIO4: J4.2 U2.26 | length 249.1
  Top Layer w10: U2.26 3494.93,2389.05 3520.62,2363.36 3592.51,2363.36 J4.2
GPIO5: H4.3 U2.29 | length 935.3
  Top Layer w10: v1(3604.05,2930.11) 3604.05,2534.91 3644.93,2494.03 U2.29
  Bottom Layer w10: H4.3 3415.76,2930.11 v1(3604.05,2930.11)
GPIO12: H4.1 U2.14 | length 317.8
  Top Layer w10: H4.1 3245,3258.72 3287.15,3258.72 3332.69,3213.18 3434.43,3213.18 3444.93,3202.68 U2.14
GPIO13: H4.2 U2.16 | length 391.2
  Top Layer w10: H4.2 3272.12,3173.74 3311.56,3173.74 3444.62,3040.68 3444.62,2977.91 3437.57,2970.86 U2.16
GPIO14: H10.8 U2.13 | length 228.1
  Top Layer w10: H10.8 3396.74,3300.86 3494.93,3202.68 U2.13
GPIO15: TP9.1 U2.23 | length 2184.8
  Top Layer w10: U2.23 3437.58,2620.86 3440.54,2620.86 3545.38,2725.7 3545.38,2975.99 v1(3538.44,2982.93) ; TP9.1 4199.1,4196.77 4199.1,3315.18 v1(4194.31,3310.39)
  Bottom Layer w10: v1(3538.44,2982.93) 3543.54,2982.93 3562.48,3001.88 3885.58,3001.88 4194.1,3310.39 v1(4194.31,3310.39)
GPIO18: H4.6 U2.30 | length 637.5
  Top Layer w10: v1(3683.16,2511.84) 3683.16,2505.8 3694.93,2494.03 U2.30
  Bottom Layer w10: H4.6 3245,2793.28 3526.44,2511.84 v1(3683.16,2511.84)
GPIO19: H4.5 U2.31 | length 784
  Top Layer w10: U2.31 v1(3744.93,2601.66)
  Bottom Layer w10: H4.5 3544.2,2601.66 v1(3744.93,2601.66)
GPIO21: H4.9 U2.33 | length 705.5
  Top Layer w10: v1(3769.87,2380.89) 3836.77,2380.89 3844.93,2389.05 U2.33
  Bottom Layer w10: H4.9 3364.98,2380.89 v1(3769.87,2380.89)
GPIO22: H4.10 U2.36 | length 986.8
  Top Layer w10: v1(3994.93,2381.39) U2.36
  Bottom Layer w10: H4.10 3391.47,2254.39 3969.64,2254.39 3999.64,2284.39 3999.64,2376.68 v1(3994.93,2381.39)
GPIO23: H4.4 U2.37 | length 1074.7
  Top Layer w10: v1(3739.23,2648.26) 3821.57,2648.26 3944.95,2524.89 3989.17,2524.89 4020.03,2494.03 4044.93,2494.03 U2.37
  Bottom Layer w10: H4.4 3245,2979.8 3576.53,2648.26 v1(3739.23,2648.26)
GPIO25: H10.4 U2.10 | length 208.2
  Top Layer w10: U2.10 3644.93,3202.68 3661.81,3202.68 H10.4
GPIO26: H10.3 U2.11 | length 421.2
  Top Layer w10: U2.11 3594.93,3202.68 3611.2,3218.95 3648.21,3218.95 3704.67,3275.41 3704.67,3313.55 3740.98,3349.86 3811,3349.86 H10.3
GPIO27: H10.7 U2.12 | length 185.9
  Top Layer w10: H10.7 3460,3291.2 3544.93,3206.28 U2.12
GPIO32: TP11.1 U2.8 | length 1141.4
  Top Layer w10: U2.8 3744.93,3202.68 3746.97,3204.72 3934.08,3204.72 4009.38,3280.01 v1(4009.38,3481.22) ; v1(4128.13,3902.72) 4128.13,3963.99 TP11.1
  Bottom Layer w10: v1(4009.38,3481.22) 4009.38,3783.97 v1(4128.13,3902.72)
GPIO33: TP10.1 U2.9 | length 1238.7
  Top Layer w10: U2.9 3694.93,3202.68 3739.91,3247.66 3870.01,3247.66 3915.29,3292.93 3915.29,3421.57 4104.91,3611.2 4104.91,4050.78 TP10.1
GPIO34: J4.4 U2.6 | length 999.1
  Top Layer w10: v1(3687.09,2718.45) 3687.09,2950.36 3834.42,3097.7 3844.93,3097.7 U2.6
  Bottom Layer w10: v1(3687.09,2718.45) 3701.88,2718.45 3855,2565.34 J4.4
GPIO35: J4.3 U2.7 | length 995.6
  Top Layer w10: v1(3794.15,2502.61) 3794.15,2592.36 3761.46,2625.05 3729.62,2625.05 3660.09,2694.57 3660.09,2962.86 3794.93,3097.7 U2.7
  Bottom Layer w10: J4.3 3794.15,2340.01 v1(3794.15,2502.61)
GPIO36: J4.5 U2.4 | length 868
  Top Layer w10: v1(3936.77,2625.05) 3936.77,3089.53 3944.93,3097.7 U2.4
  Bottom Layer w10: v1(3936.77,2625.05) 3927.36,2615.64 3927.36,2328.51 J4.5
GPIO39: J4.6 U2.5 | length 928.8
  Top Layer w10: U2.5 3894.93,3097.7 3907.59,3085.03 3907.59,2616.72 3976.76,2547.55 v1(3999.33,2547.55)
  Bottom Layer w10: v1(3999.33,2547.55) 4055,2491.89 J4.6
L5_2: D17.1 L5.2 U32.1 | length 377.2
  Top Layer w10: L5.2 2823.65,3670.86 2904.9,3589.61 2904.9,3554.86 D17.1 2985.1,3554.86 2993.1,3546.86 3047.6,3546.86 U32.1
L6_2: D20.2 L6.2 | length 120
  Top Layer w10: L6.2 3173.55,1907.87 3187.71,1893.7 3194.54,1893.7 D20.2
LED19_2: LED19.2 R56.2 | length 57.9
  Top Layer w10: LED19.2 R56.2
Q5_4: Q5.4 R46.1 | length 324.3
  Top Layer w10: R46.1 2702.4,2400.14 2683.19,2400.14 2638.59,2355.55 2616.04,2355.55 2605.56,2345.07 2605.56,2295.07 2615.11,2285.51 2682.73,2285.51 2707,2261.24 Q5.4
Q5_6: Q5.6 R46.3 | length 219.7
  Top Layer w10: R46.3 2627.6,2400.14 2587.94,2360.49 2587.94,2286.86 2621.93,2252.86 Q5.6
R47_2: R46.2 R47.2 | length 230.4
  Top Layer w10: R46.2 2665,2461.82 2665.06,2461.88 2717.86,2461.88 2724.14,2455.59 2838.4,2455.59 2839.68,2456.88 R47.2
R48_1: LED17.2 R48.1 | length 149.1
  Top Layer w10: LED17.2 2685.47,1973.83 2685.53,1973.88 2756.82,1973.88 2768.32,1962.38 2768.32,1950.87 R48.1
R48_2: R48.2 U31.6 | length 941.4
  Top Layer w10: U31.6 2756.06,2780.86 v1(2778.42,2758.51) ; v1(2824.43,2117.26) 2822.57,2115.39 2822.57,1955.92 2827.63,1950.87 R48.2
  Bottom Layer w10: v1(2778.42,2758.51) 2739.7,2719.78 2739.7,2220.39 2824.43,2135.66 v1(2824.43,2117.26)
R49_1: LED18.1 R49.1 | length 137.7
  Top Layer w10: LED18.1 2693.81,2009.09 2697.34,2005.56 2750.67,2005.56 2763.32,2018.2 2763.32,2030.87 R49.1
R50_2: R50.2 U31.2 | length 257.2
  Top Layer w10: R50.2 2810.63,2599.12 2837.45,2599.12 2969.19,2730.86 U31.2
R51_1: C51.2 R46.5 R51.1 | length 342.8
  Top Layer w10: R46.5 2665,2351.57 2667.61,2354.18 2766.52,2354.18 ; v1(2766.52,2320.59) 2766.52,2354.18 ; C51.2 v1(2810.02,2281.7) ; R51.1 2783.32,2406.53 2766.52,2389.74 2766.52,2354.18
  Bottom Layer w10: v1(2766.52,2320.59) 2805.42,2281.7 v1(2810.02,2281.7)
RST: C7.2 H4.8 Q1.6 R7.2 SW3.2 TP12.1 U2.3 | length 3632.4
  Top Layer w10: Q1.6 3790.01,1873.46 3794.73,1878.18 v1(3797.41,1878.18) ; v1(3791.46,2153.03) C7.2 3791.46,2094.97 3791.46,2084.09 3803.19,2072.36 3803.19,2065.86 ; R7.2 3803.19,2065.86 ; U2.3 3994.93,3202.68 4046.9,3254.64 4091.9,3254.64 4093.57,3252.97 ; TP12.1 4131.42,3857.28 4131.42,3290.82 4093.57,3252.97 ; 3803.19,2065.86 3814.33,2065.86 3829.33,2080.86 SW3.2 3914.34,2080.86 4124.84,2291.36 4124.84,3221.7 4093.57,3252.97
  Bottom Layer w10: H4.8 3196.45,2552.32 3196.45,2381.68 3425.1,2153.03 3654.66,2153.03 ; v1(3791.46,2153.03) 3654.66,2153.03 ; v1(3797.41,1878.18) 3654.66,2020.93 3654.66,2153.03
RTS: Q1.1 Q1.5 U34.6 | length 411.3
  Top Layer w10: U34.6 3648.73,2118.45 3669.92,2118.45 v1(3678.8,2127.34) ; Q1.5 3745,1890.32 3770.59,1915.9 3770.59,1925.31 Q1.1@3770.59,1939.52 ; Q1.1 Q1.1@3770.59,1939.52 ; v1(3797.4,1960.45) 3776.46,1939.52 Q1.1@3770.59,1939.52
  Bottom Layer w10: v1(3678.8,2127.34) 3678.8,2079.05 v1(3797.4,1960.45)
RXD_TTL: H10.6 U2.27 U30.6 | length 2146.5
  Top Layer w10: v1(3185.22,3746.62) 3185.22,4077.01 3275,4166.8 U30.6 ; v1(3494.6,3026.34) 3494.6,3043.74 v1(3519.46,3068.59) ; v1(3541.05,3013.28) 3564.61,2989.72 3564.61,2513.7 3544.93,2494.03 U2.27
  Bottom Layer w10: v1(3185.22,3746.62) 3185.22,3675.64 H10.6 3560,3109.14 v1(3519.46,3068.59) ; v1(3494.6,3026.34) 3507.66,3013.28 v1(3541.05,3013.28)
S$439215: 
SD0: TP5.1 U2.21 | length 2847.6
  Top Layer w10: U2.21 3507.48,2720.86 v1(3522.12,2735.51) ; TP5.1 4137.98,4697.89 4137.98,4787.9 4156.49,4806.41 4177.89,4806.41 4242.97,4741.34 4242.97,3242.66 v1(4219.7,3219.39)
  Bottom Layer w10: v1(3522.12,2735.51) 3618.07,2831.45 3831.77,2831.45 v1(4219.7,3219.39)
SD1: TP6.1 U2.22 | length 2530.2
  Top Layer w10: v1(3191.27,2865.64) 3191.27,3333.99 3202.82,3345.53 3363.63,3345.53 3593.01,3574.91 v1(3593.01,3620.89) ; v1(3311.08,2762.28) 3311.08,2692.39 3332.6,2670.86 U2.22 ; v1(4092.02,4227.73) 4092.02,4477.89 TP6.1
  Bottom Layer w10: v1(3191.27,2865.64) 3206.06,2850.86 3265.14,2850.86 3311.08,2804.91 v1(3311.08,2762.28) ; v1(3593.01,3620.89) 4092.02,4119.9 v1(4092.02,4227.73)
SD2: TP8.1 U2.17 | length 2080.4
  Top Layer w10: U2.17 3437.57,2920.86 3437.57,2904.2 v1(3445.53,2896.24) ; v1(4137.78,4151.02) 4137.78,4303.65 TP8.1 ; v1(4148.86,3181.74) 4147.63,3182.97 4147.63,3744.61 v1(4155.26,3752.24)
  Bottom Layer w10: v1(3445.53,2896.24) 3863.36,2896.24 v1(4148.86,3181.74) ; v1(4137.78,4151.02) 4155.26,4133.53 v1(4155.26,3752.24)
SD3: TP7.1 U2.18 | length 2001.7
  Top Layer w10: U2.18 3437.57,2870.86 3456.71,2870.86 3470.61,2884.76 3470.61,3048.61 3406.42,3112.8 v1(3406.42,3170.8) ; v1(3515.33,3268.7) 3515.33,3464.41 v1(3591.02,3540.09) ; v1(4113.2,4092.72) 4113.2,4159.26 4119.44,4165.49 4119.44,4395.31 TP7.1
  Bottom Layer w10: v1(3406.42,3170.8) 3417.43,3170.8 v1(3515.33,3268.7) ; v1(3591.02,3540.09) 4113.2,4062.28 v1(4113.2,4092.72)
TXD_O_TTL: R43.2 U29.2 U30.2 U30.4 U30.11 | length 1250.2
  Top Layer w10: U30.2 3075,4329.9 3109.11,4364.02 3175,4364.02 ; U30.4 3175,4364.02 ; U30.11 v1(3175,4446.95) 3175,4364.02 ; v1(3897.94,4474.27) v1@3899.94,4476.27 ; R43.2 3911.5,4563.06 3899.94,4551.51 v1@3899.94,4476.27 ; U29.2 3905.35,4470.86 v1@3899.94,4476.27
  Bottom Layer w10: v1(3175,4446.95) 3870.62,4446.95 v1(3897.94,4474.27)
TXD_TTL: H10.5 U2.28 U30.12 | length 2575.4
  Top Layer w10: v1(3123.91,3857.57) 3123.91,4147.38 3250,4273.47 3250,4418.23 3198.07,4470.15 3198.07,4577.84 3191.69,4584.22 3168.35,4584.22 3125,4540.86 U30.12 ; v1(3580.82,3059.91) 3580.82,2508.14 3594.93,2494.03 U2.28
  Bottom Layer w10: v1(3123.91,3857.57) 3660,3321.49 H10.5 3660,3139.09 v1(3580.82,3059.91)
TXEN_TTL: U29.4 U30.1 | length 946.7
  Top Layer w10: U30.1 v1(3025,4408.27) ; v1(3794.71,4499.99) 3802.98,4508.27 U29.4
  Bottom Layer w10: v1(3025,4408.27) 3116.72,4499.99 v1(3794.71,4499.99)
U26_3: R36.1 R37.2 U26.3 | length 786.4
  Top Layer w10: v1(3362,3754.53) 3364.93,3754.53 3371,3748.47 U26.3 ; v1(3675,3750.16) R37.2 3906.26,3690.24 3956.56,3639.93 3990,3639.93 R36.1
  Bottom Layer w10: v1(3362,3754.53) 3670.62,3754.53 v1(3675,3750.16)
U28_3: R42.1 U28.3 | length 274.4
  Top Layer w10: v1(3899.35,4314.18) 3899.35,4353.4 3909.22,4363.27 U28.3 ; v1(4047.04,4346.66) R42.1
  Bottom Layer w10: v1(3899.35,4314.18) 4014.55,4314.18 v1(4047.04,4346.66)
U30_13: R44.2 U30.13 | length 107.2
  Top Layer w10: R44.2 3072.04,4532.85 U30.13
U32_3: R34.1 R35.2 U32.3 | length 740.6
  Top Layer w10: R34.1 R35.2 2819.37,3771.78 2955.43,3635.72 3095.25,3635.72 3122.4,3608.57 U32.3
U34_10: C58.2 U34.10 | length 967.2
  Top Layer w10: v1(3460.68,2128.55) U34.10 ; C58.2@3590,1685.56 3619.65,1685.56 v1(3678.25,1744.15)
  Bottom Layer w10: v1(3460.68,2128.55) 3456.48,2132.74 3331.17,2132.74 3263.43,2065.01 3263.43,2040.07 3305.64,1997.86 3462.21,1997.86 3678.25,1781.82 v1(3678.25,1744.15)
UART0_RX: H10.1 U2.34 U34.8 | length 1878
  Top Layer w10: U34.8 3570,2199.8 3577.53,2207.34 3821.17,2207.34 3899.01,2285.18 v1(3899.01,2350.3) ; U2.34 v1(3894.93,2540.89)
  Bottom Layer w10: v1(3899.01,2350.3) 3894.93,2354.39 v1(3894.93,2540.89) 3894.93,2861.78 4244.63,3211.47 4244.63,3293.05 4199.04,3338.64 4139.93,3338.64 4102.15,3300.86 H10.1
UART0_TX: H10.2 U2.35 U34.9 | length 1944.3
  Top Layer w10: U34.9 3530.63,2199.8 3586.98,2256.16 3772.53,2256.16 3798.81,2282.43 3798.81,2308.39 3863.95,2373.53 3929.41,2373.53 3944.93,2389.05 U2.35 3944.93,2496.01 v1(3950.58,2501.66)
  Bottom Layer w10: v1(3950.58,2501.66) 3950.58,2531.64 4262.03,2843.09 4262.03,3306.05 4209.87,3358.22 4017.35,3358.22 H10.2
USB1_2: D3.2 USB1.2 USB1.11 | length 351
  Top Layer w10: USB1.2 3155.52,1827.17 3177.99,1849.64 3276.37,1849.64 3286.45,1859.72 3305.68,1859.72 3329.86,1835.55 3344.49,1835.55 ; USB1.11 3344.49,1835.55 ; D3.2 3360,1851.06 3344.49,1835.55
USB1_4: R1.2 USB1.4 | length 350.3
  Top Layer w10: v1(3020.08,1854.28) 3018.16,1856.19 3018.16,1922.85 3018.22,1922.9 R1.2 ; v1(3194.73,1754.01) 3194.73,1755.49 3200.8,1761.57 USB1.4
  Bottom Layer w10: v1(3020.08,1854.28) 3094.46,1854.28 v1(3194.73,1754.01)
USB1_10: R55.2 USB1.10 | length 245.7
  Top Layer w10: v1(3318.91,1754.42) USB1.10 ; v1(3448.05,1689.02) 3467.11,1689.02 3473.22,1682.9 R55.2
  Bottom Layer w10: v1(3318.91,1754.42) 3384.32,1689.02 v1(3448.05,1689.02)
USB_N: D19.4 U34.2 | length 122.4
  Top Layer w10: U34.2 3530.63,1901.92 3544.94,1901.92 3563.51,1883.36 3572.4,1883.36 D19.4
USB_P: D19.6 U34.1 | length 94.1
  Top Layer w10: U34.1 3491.26,1889.69 3497.6,1883.36 D19.6
V_BAT: R3.2 R4.1 | length 81
  Top Layer w10: R4.1 2830.11,2918.82 2830.11,2931.8 2838.22,2939.91 2838.22,2952.91 R3.2
VBAT0+: C42.2 C45.2 L1.2 L5.1 SW2.1 U26.4 U26.5 U32.4 U32.5 | length 3222.7
  Top Layer w39.37: SW2.1 2603.04,3192.78 2739.74,3192.78 2785.37,3238.41 2785.37,3503.41 ; C45.2 2550,4053.49 2519.02,4053.49 2490.08,4024.55 2490.08,3786.93 2537,3740.01 L5.1 2602.34,3670.86 2769.79,3503.41 2785.37,3503.41 ; U32.5 3085,3729.55 3122.4,3729.55 3122.4,3706.78 ; U26.5@3508.15,3785.86 3542.3,3785.86 3553.6,3785.86 ; C42.2 3780,3865.61 3756.85,3888.76 L1.2 3683.29,3985.86 3683.29,3915.55 3553.6,3785.86 ; 2785.37,3503.41 3148.35,3503.41 3179.69,3534.76 3179.69,3626.72 U32.4 3122.4,3706.78 ; 3122.4,3706.78 3430.09,3706.78 3462.61,3739.3 3462.61,3748.47 3508.15,3748.47 3553.69,3748.47 3553.69,3785.86 3553.6,3785.86
VBAT+: C50.2 D1.1 R4.2 R51.2 SW2.2 U31.5 | length 4838.7
  Top Layer w39.37: D1.1 2262.84,5076.56 2247.6,5061.32 2247.6,3733.26 SW2.2 ; v1(2727.92,2933.93) v1@2735,2926.86 ; 2735,1690.87 v1(2735,1816.7) 2790.05,1816.7 2936.99,1963.64 2936.99,2296.36 2869.66,2363.68 ; U31.5 v1@2735,2926.86 ; R4.2@2800,2960.86 2763.85,2955.7 v1@2735,2926.86 ; C50.2 2868.36,2362.39 2869.66,2363.68 ; R51.2 2869.66,2363.68
  Bottom Layer w39.37: SW2.2 2710,2951.86 v1(2727.92,2933.93) 2601.97,2807.99 2601.97,1949.73 v1(2735,1816.7) 2735,1690.87
  other v2: 2665,1755.87
VBAT-: C51.1 D2.2 J2.1 Q5.3 R3.1 R46.6 | length 3896.4
  Top Layer w39.37: D2.2 D2.2@2301.51,1915.87 ; 2385,1690.87 2385,1816.7 2330.17,1871.54 2330.17,1915.87 D2.2@2301.51,1915.87 ; R46.6 2742.95,2280.2 v1@2742.95,2180.45 ; Q5.3 2707,2180.45 ; v1(2742.95,2169.12) v1@2742.95,2180.45 ; C51.1 v1(2885.78,2218.95) ; R3.1@2870,2910.86 2910,2920.86 2910,3070.86 ; J2.1 3535,3564.03 3477.63,3506.66 3237.07,3506.66 2896.55,3166.14 2896.55,3069.76 2550.55,3069.76 2468.19,2987.41 2468.19,2278.49 2566.16,2180.51 ; D2.2@2301.51,1915.87 2566.16,2180.51 ; 2566.16,2180.51 2706.94,2180.51 2707,2180.45 ; 2707,2180.45 v1@2742.95,2180.45
  Bottom Layer w39.37: v1(2742.95,2169.12) 2742.95,2144.18 2809.49,2077.64 2856.51,2077.64 2893.8,2114.93 2893.8,2210.93 v1(2885.78,2218.95)
  other v2: 2450,1760.87
VCC_TTL: C41.2 C43.2 C47.1 C48.1 CN1.2 CN2.2 CN3.2 CN4.2 CN5.2 D13.2 J5.1 R36.2 R42.2 U28.1 | length 3934.1
  Top Layer w31.5: C41.2 3280,3967.72 v1(3313.83,4001.55) ; CN5.2 3539.3,4936.56 3539.3,4440.86 3573.62,4406.55 3585,4406.55 C48.1 3585,4308.85 C48.1@3585,4263.45 ; D13.2 3544.15,3924.86 3513.15,3955.86 J5.1 3402.1,3955.86 3399.58,3958.39 3399.58,4082.03 3581,4263.45 C48.1@3585,4263.45 ; C43.2 3940.92,3740.16 3951.64,3729.43 3990,3729.43 R36.2@3990,3707.34 ; U28.1 3981.64,4288.47 ; R36.2 R36.2@3990,3707.34 ; C47.1 4010.32,4398.22 4012.96,4395.57 R42.2 4012.96,4319.78 3981.64,4288.47 ; C48.1@3585,4263.45 3585,4224.95 3942.46,4224.95 3981.64,4264.14 3981.64,4288.47 ; 3981.64,4288.47 4077.93,4192.18 4077.93,3795.26 R36.2@3990,3707.34
  Bottom Layer w31.5: CN1.2 CN2.2 CN3.2 ; CN3.2 CN4.2 CN5.2 ; v1(3313.83,4001.55) 3356.41,4001.55 3402.1,3955.86 J5.1
VIN: C49.1 C53.2 D16.1 P1.3 Q4.2 TP4.1 U33.1 U33.3 | length 3207
  Top Layer w10: Q4.2 Q4.2@2517.92,2693.47 ; v1(2536.35,3001.28) 2536.35,2886.76 ; D16.1 2605,2627.86 2583.52,2627.86 Q4.2@2517.92,2693.47 ; C49.1 2552.67,2886.76 2536.35,2886.76 ; U33.1 2729.28,4273.47 2722.66,4280.09 v1(2720.53,4280.09) 2720.53,4339.52 2729.28,4348.27 U33.3 2771.49,4348.27 2790.95,4348.27 2790.95,4358.02 2800.69,4367.77 2820.31,4367.77 C53.2 ; v1(2963.71,3134.16) 3068.51,3029.38 ; TP4.1 3065,3025.86 3068.51,3029.38 ; P1.3 3068.51,3029.38 ; Q4.2@2517.92,2693.47 2500.04,2693.47 2499.98,2693.53 2499.98,2850.39 2536.35,2886.76
  Bottom Layer w10: v1(2536.35,3001.28) 2536.35,3185.14 2705.48,3354.26 ; v1(2720.53,4280.09) 2705.48,4265.03 2705.48,3354.26 ; v1(2963.71,3134.16) 2939.88,3134.16 2719.78,3354.26 2705.48,3354.26
VIN0: D4.1 D16.2 Q4.1 R45.1 | length 1916.8
  Top Layer w10: Q4.1 2571.56,2768.26 2571.56,2732.51 2646.55,2657.51 2646.55,2570.55 ; D16.2 2630.91,2504.7 2643.86,2504.7 ; v1(2643.86,2473.97) 2643.86,2504.7 ; R45.1@2705,2570.55 2678.1,2570.55 2646.55,2570.55 ; v1(3609.03,1816.88) 3613.34,1821.19 3635,1821.19 D4.1 ; 2643.86,2504.7 2646.55,2507.39 2646.55,2570.55
  Bottom Layer w10: v1(2643.86,2473.97) 2643.86,2198.64 2960.72,1881.78 3544.14,1881.78 v1(3609.03,1816.88)
VUSB: C57.2 D3.1 D4.2 D19.5 F2.2 L6.1 R56.1 U34.7 | length 1351.7
  Top Layer w10: L6.1 3173.55,2033.86 3173.55,2068.62 3203.95,2099.03 3241.98,2099.03 3242.04,2099.09 3242.04,2109.97 ; R56.1 3242.04,2109.97 ; D3.1 3360,2090.68 ; D19.5 3535,1818.86 ; C57.2@3540,1685.56 3580.24,1725.8 3590.66,1725.8 3609.09,1744.22 3609.09,1759.7 3615.57,1759.7 ; U34.7 3609.37,2118.45 3603.88,2112.97 3486.8,2112.97 3456.48,2082.64 ; F2.2@3710,1783.14 3683.1,1783.14 3660.91,1760.95 3660.91,1759.7 D4.2 3622.05,1759.7 3615.57,1759.7 ; 3242.04,2109.97 3340.7,2109.97 3360,2090.68 ; 3360,2090.68 3398.73,2090.68 3406.76,2082.64 3456.48,2082.64 ; 3456.48,2082.64 3456.48,1843.61 3481.29,1818.8 3534.94,1818.8 3535,1818.86 ; 3535,1818.86 3539.89,1813.96 3566.94,1813.96 3615.57,1765.34 3615.57,1759.7
VUSB0: D20.1 F2.1 | length 574.5
  Top Layer w10: D20.1 3283.77,2048.03 3283.77,2048.99 v1(3291.68,2056.91) ; v1(3675.67,1827.17) 3683.1,1819.74 3683.1,1818.58 F2.1
  Bottom Layer w10: v1(3291.68,2056.91) 3445.94,2056.91 v1(3675.67,1827.17)
VUSB_CHG: C52.2 LED17.1 LED18.2 U31.4 U31.8 | length 1359
  Top Layer w10: LED17.1 2734.53,1927.9 2732.58,1925.95 2663.27,1925.95 2653.98,1935.24 2653.98,2031.54 2682.67,2060.22 2728.61,2060.22 2736.19,2052.64 ; U31.8 2735,2679.57 v1(2763.92,2650.66) ; LED18.2 2736.19,2052.64 ; v1(2829.99,2215.72) 2837.85,2207.86 2852.94,2207.86 C52.2 2852.94,2164.3 2836.76,2164.3 2736.19,2063.74 2736.19,2052.64 ; v1(2929.06,2809.91) 2950.02,2830.86 U31.4
  Bottom Layer w10: v1(2829.99,2215.72) 2837.33,2223.07 2837.33,2577.24 v1(2763.92,2650.66) 2769.81,2650.66 v1(2929.06,2809.91)
pads on no net: BT1. Q5.2 Q5.5 R46.4 SW2.3 U2.32 U26.6 U28.4 U29.1 U30.8 U30.9 U30.10 U31.9 U32.6 U33.4 U34.5 USB1. USB1.3 USB1.9

## Other copper
Top Layer:
  rectangle net VBAT+: 2635,1590.87 2835,1790.87
  rectangle net VBAT-: 2285,1590.87 2485,1790.87
Bottom Layer:
  rectangle net VBAT+: 2635,1590.87 2835,1790.87
  rectangle net VBAT-: 2285,1590.87 2485,1790.87
  rectangle net VBAT-: 2285,1590.87 2485,1790.87

## Silkscreen, mask and mechanical layers (free items; w line width, h text height)
Top Overlay:
  text "-" at 2195.95,1735.87 h118.11 r270
  text "+" at 2918.24,1677.62 h118.11 r225
Top Solder:
  rectangle net VBAT+: 2635,1590.87 2835,1790.87
  rectangle net VBAT-: 2285,1590.87 2485,1790.87
Bottom Solder:
  rectangle net VBAT+: 2635,1590.87 2835,1790.87
  rectangle net VBAT-: 2285,1590.87 2485,1790.87